# Altium PCB VM53_BASE_BOARD.PcbDoc (part 2 of 2)
Units mil, origin at the board's own origin, x right, y up, seen from the top; angles counter-clockwise.
Board outline 6151.77 x 3750.19 mil, 4 copper layers (Top Layer, Internal Plane 1, Internal Plane 2, Bottom Layer), stack 30.635 mil thick; 190 components, 126 nets, 711 pads, 402 vias.
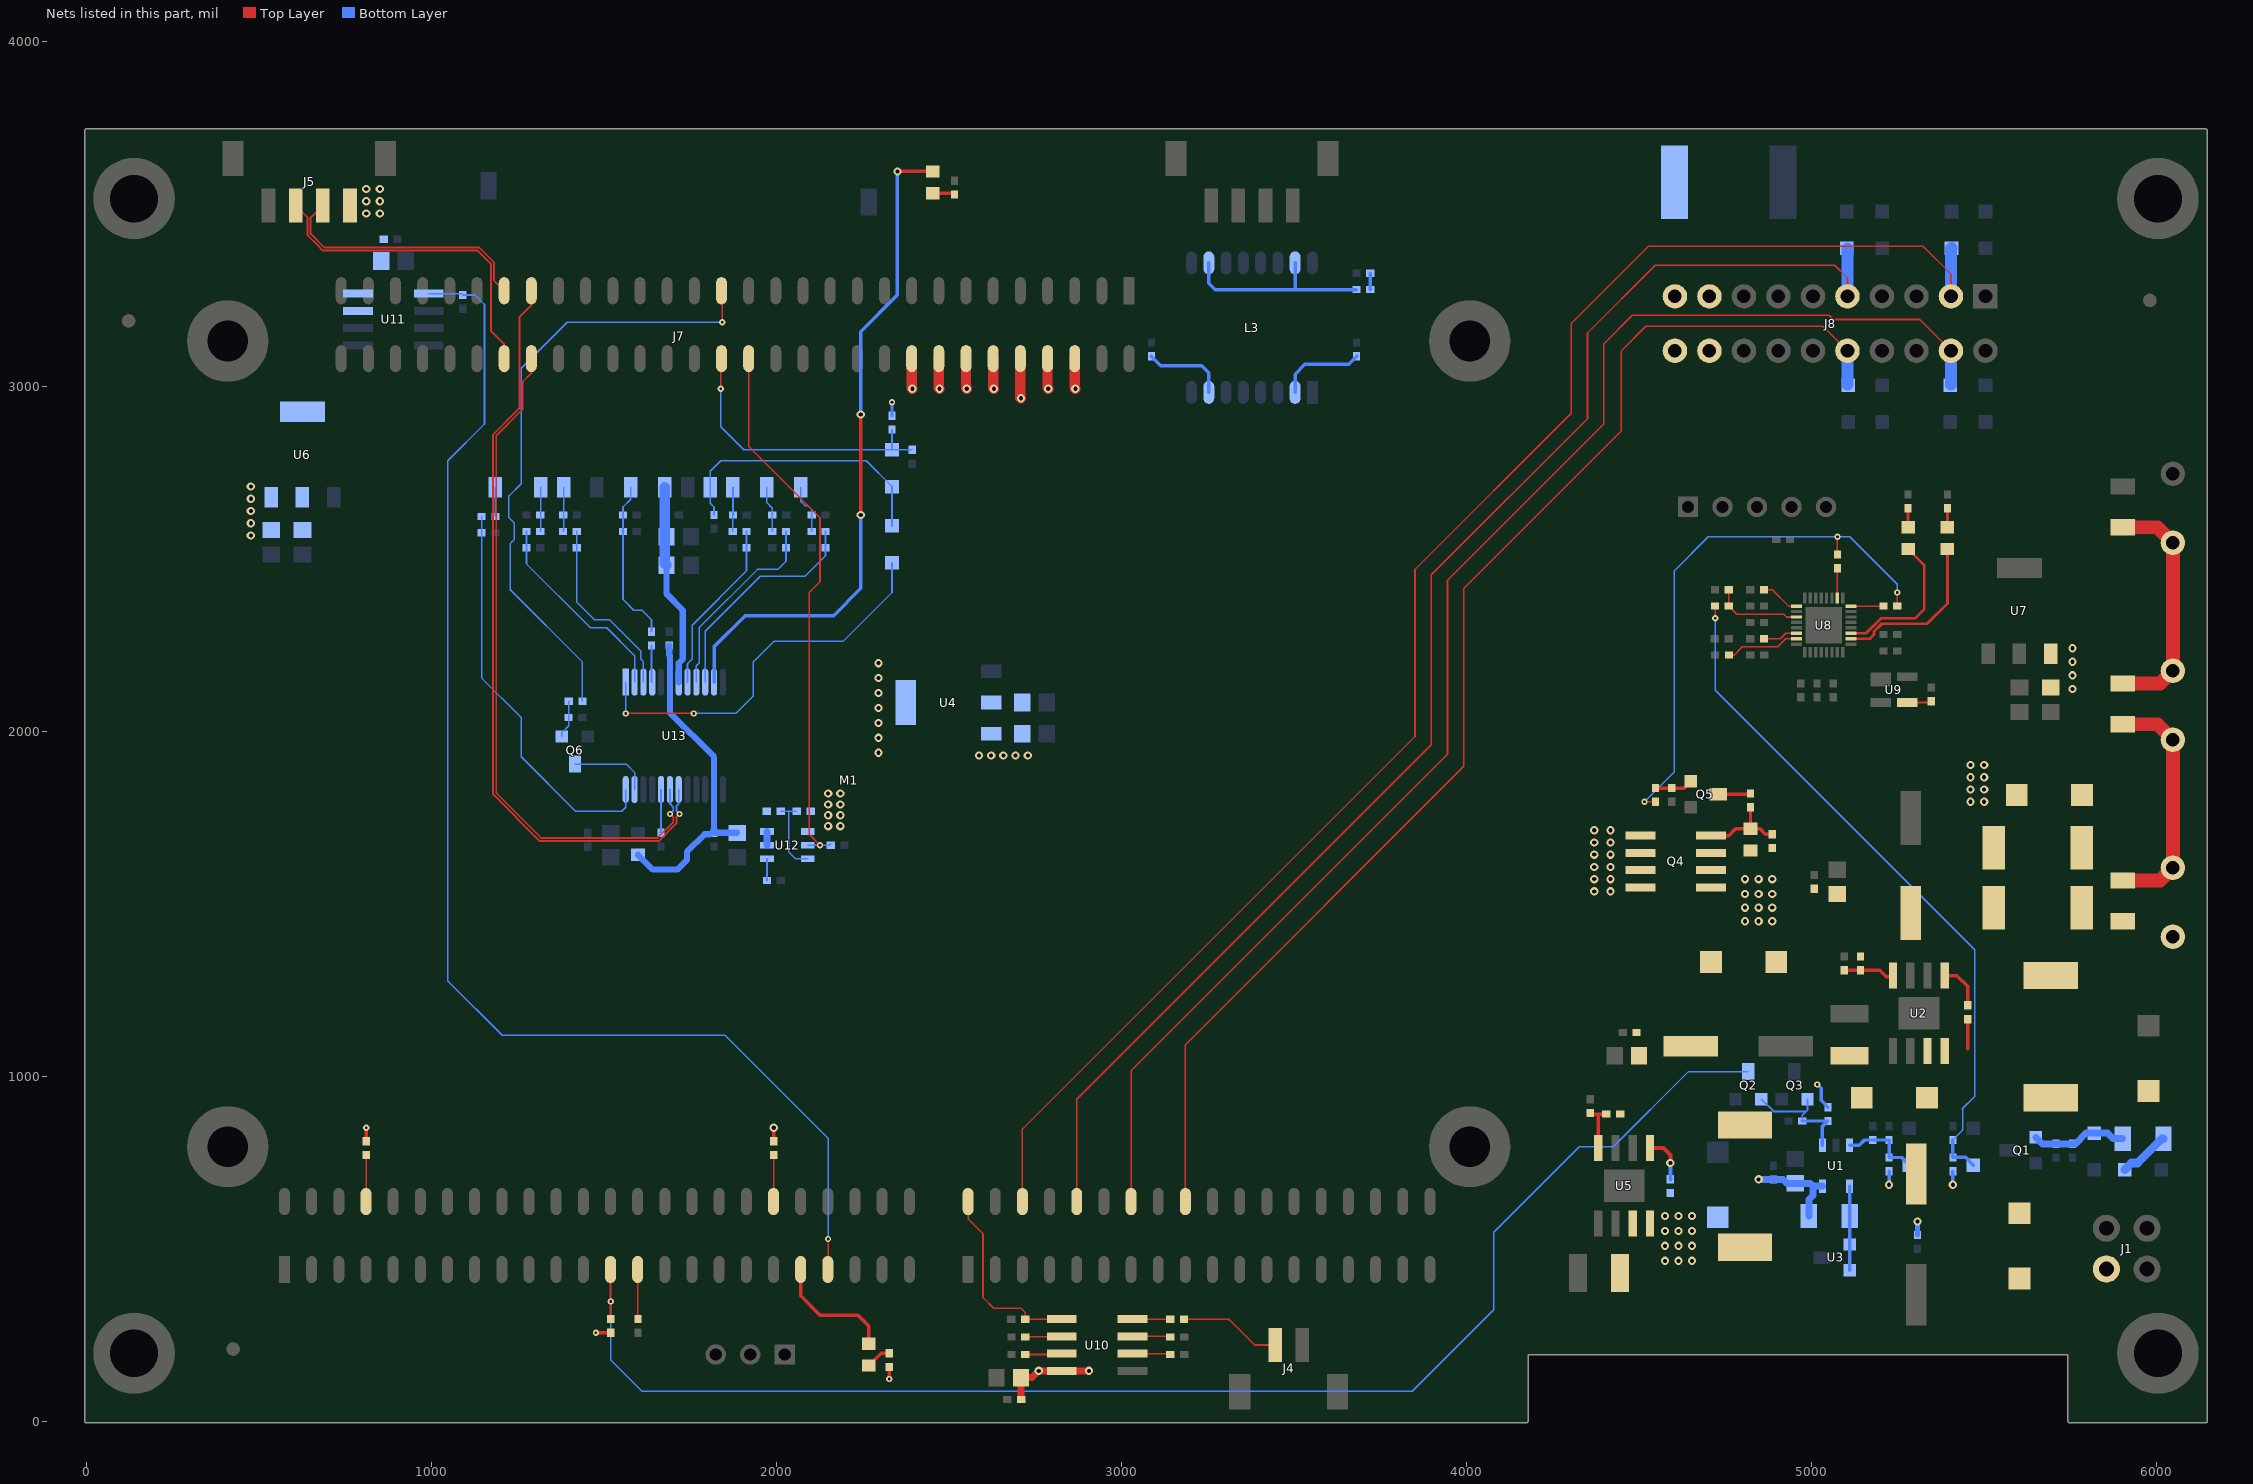
[diagram p4: the nets of this part, all layers, seen from the top]

## Via types
v1: diameter 24, hole 12, Top Layer to Bottom Layer, tented both sides, 264 vias
v2: diameter 18, hole 8, Top Layer to Bottom Layer, tented both sides, 138 vias

## Nets (pads, with @x,y where several pads share a name; then routed paths per layer and width w, separated by ;. In a path a pad name is that pad's centre, name@x,y a point inside that pad or via, vN(x,y) a via of type N, cw(c..) or ccw(c..) an arc to the next point about the centre after c; other vN are vias at no path point) (continued)
MCU-RTS: R37.1 U8.25 | length 114.1
  Top Layer w4.7: R37.1@4862.2,2409.45 4885.83,2409.45 4933.07,2362.2 U8.25@4956.69,2362.2
MCU-RXD: R38.1 U8.30 | length 101
  Top Layer w4.7: R38.1@4862.2,2267.72 4909.45,2267.72 4925.2,2283.46 U8.30@4956.69,2283.46
MCU-TXD: R39.1 U8.31 | length 216
  Top Layer w4.7: R39.1@4760.28,2220.47 4775.59,2220.47 4799.21,2244.09 4901.57,2244.09 4925.2,2267.72 U8.31@4956.69,2267.72
NetC5_2: C5.2 D3.1 R7.2 R8.2 U1.3 | length 239.5
  Bottom Layer w10: U1.3@5110.24,799.21 5137.8,799.21 5153.35,814.77 C5.2@5177.17,814.77 R8.2@5224.41,814.77 R7.2@5224.41,763.97 5261.62,763.97 D3.1@5283.46,742.13
NetC6_1: C6.1 D4.2 Q1.2 R2.1 R6.1 | length 279.3
  Bottom Layer w20: Q1.2@5649.61,822.83 5668.85,803.59 R6.1@5708.66,803.59 C6.1@5755.91,803.59 5764.22,803.59 5795.28,834.65 D4.2@5818.9,834.65 5858.27,834.65 5874.02,818.9 R2.1@5901.57,818.9
NetC7_1: C7.1 D7.2 L1.1 U2.8 | length 86.2
  Top Layer w10: 5452.76,1078.74 C7.1@5452.76,1164.91
NetC7_2: C7.2 U2.1 | length 134.9
  Top Layer w10: U2.1@5385.83,1291.34 5421.26,1291.34 5452.76,1259.84 C7.2@5452.76,1204.91
NetC9_1: C9.1 D6.1 R13.2 R14.2 R15.1
NetC9_2: C9.2 C13.1 R15.2 R16.1 | length 696.1
  Top Layer w40: R15.2@5901.57,1566.93 6010.24,1566.93 C9.2@6047.24,1603.94 C13.1@6047.24,1974.8 6002.36,2019.68 R16.1@5901.57,2019.68
NetC13_2: C13.2 C14.1 R16.2 R17.1 | length 696.1
  Top Layer w40: R16.2@5901.57,2137.8 6010.24,2137.8 C13.2@6047.24,2174.8 C14.1@6047.24,2545.67 6002.36,2590.55 R17.1@5901.57,2590.55
NetC17_1: C17.1 D9.2 L2.1 U5.8
  other v1: 4574.8,464.57 4614.17,464.57 4653.54,464.57 4574.8,507.87 4614.17,507.87 4653.54,507.87 4574.8,551.18 4614.17,551.18 4653.54,551.18 4574.8,594.49 4614.17,594.49 4653.54,594.49
NetC17_2: C17.2 U5.1 | length 137.9
  Top Layer w12: U5.1@4531.5,791.34 4570.87,791.34 4590.55,771.65 v1(4590.55,748.03)
  Bottom Layer w12: C17.2@4590.55,700.98 v1(4590.55,748.03)
NetC19_1: C19.1 Q4.4 R20.1 R21.2 | length 254.4
  Top Layer w10: Q4.4@4708.66,1697.05 4760.04,1697.05 4779.53,1716.54 C19.1@4822.83,1716.54 ; R21.2@4822.83,1779.34 C19.1@4822.83,1716.54 ; R20.1@4885.83,1701.23 4865.7,1701.23 4850.39,1716.54 C19.1@4822.83,1716.54
NetC29_1: C29.1 U9.3 | length 71.1
  Top Layer w4.7: U9.3@5276.79,2082.61 5342.89,2082.61 C29.1@5346.46,2086.17
NetC34_1: C34.1 L3.7 | length 242.8
  Bottom Layer w10: C34.1@3086.61,3086.17 3113.73,3059.06 3232.28,3059.06 3252.95,3038.39 L3.7@3252.95,2981.69
NetC35_1: C35.1 L3.2 | length 252.3
  Bottom Layer w10: L3.2@3502.95,2981.69 3502.95,3034.45 3531.5,3062.99 3657.92,3062.99 C35.1@3681.1,3086.17
NetC36_2: C36.2 R46.2 U12.6 | length 228.2
  Bottom Layer w4.7: C36.2@2012,1767.72 2035.43,1767.72 ; R46.2@2058.87,1767.72 2035.43,1767.72 ; U12.6@2090.55,1629.92 2055.12,1629.92 2035.43,1649.61 2035.43,1767.72
NetC52_1: C52.1 R66.1 | length 47.2
  Bottom Layer w10: R66.1@3720.91,3279.53 C52.1@3720.91,3326.77
NetD1_1: D1.1 J1.1
NetD2_2: D2.2 R2.2 | length 149.7
  Bottom Layer w25: D2.2@5907.48,728.35 5927.17,748.03 5944.88,748.03 6015.75,818.9 R2.2@6019.69,818.9
NetD5_2: D5.2 U2.7
NetD10_1: D10.1 R24.1 R25.1 R26.1 | length 2004.5
  Top Layer w4.7: R25.1@4719.84,2362.2 4720.47,2361.57 v2(4720.47,2326.77)
  Bottom Layer w4.7: v2(4720.47,2326.77) 4720.47,2118.11 5472.44,1366.14 5472.44,941.05 5437.01,905.61 5437.61,905.01 5437.61,842.68 R26.1@5409.45,814.52
  Bottom Layer w10: R26.1@5409.45,814.52 R24.1@5409.45,764.22 5446.41,764.22 D10.1@5468.5,742.13
NetD11_1: D11.1 R34.2 | length 54.9
  Top Layer w8: D11.1@5393.7,2590.55 R34.2@5393.7,2645.48
NetD12_1: D12.1 R35.2 | length 54.9
  Top Layer w8: D12.1@5279.53,2590.55 R35.2@5279.53,2645.48
NetD13_1: D13.1 R42.2 | length 73.8
  Top Layer w10: D13.1@2267.72,161.42 2303.34,197.04 R42.2@2326.77,197.04
NetD13_2: D13.2 M1.B39 | length 361.5
  Top Layer w10: M1.B39@2070,439.45 2070,363.07 2125.98,307.09 2236.22,307.09 2267.72,275.59 D13.2@2267.72,224.41
NetD14_1: D14.1 U13.11 | length 1952.7
  Top Layer w10: v1(2244.09,2625.98) v1(2244.09,2917.32) ; v1(2350.39,3622.05) D14.1@2452.76,3622.05
  Bottom Layer w10: U13.11@1818.9,2141.73 1818.9,2244.09 1909.45,2334.65 2165.35,2334.65 2244.09,2413.39 v1(2244.09,2625.98) ; v1(2244.09,2917.32) 2244.09,3157.48 2350.39,3263.78 v1(2350.39,3622.05)
NetD14_2: D14.2 R51.2 | length 64.7
  Top Layer w10: D14.2@2452.76,3559.06 2511.62,3559.06 R51.2@2515.75,3554.93
NetD15_1: D15.1 U13.1 | length 1151.6
  Top Layer w4.7: v2(1562.99,2051.18) v2(1759.84,2051.18)
  Bottom Layer w4.7: v2(1562.99,2051.18) U13.1@1562.99,2141.73 ; v2(1759.84,2051.18) 1881.89,2051.18 1933.07,2102.36 1933.07,2200.79 1992.13,2259.84 2192.91,2259.84 2334.65,2401.57 D15.1@2334.65,2488.19
NetF1_2: F1.2 J8.17 J8.18 J8.19 J8.20
NetJ4_1: J4.1 R43.2 | length 294.6
  Top Layer w4.7: R43.2@3181.29,295.28 3311.02,295.28 3322.83,283.46 3385.83,220.47 J4.1@3444.88,220.47
NetJ7_11: J7.11 R58.2 | length 84.7
  Bottom Layer w4.7: J7.11@1185.04,2706.69 1185.04,2622.24 R58.2@1185.23,2622.05
NetL3_10: L3.10 L3.15 R66.2 | length 572.1
  Bottom Layer w10: L3.10@3252.95,3356.89 3252.95,3298.23 3271.65,3279.53 3503.94,3279.53 ; L3.15@3502.95,3356.89 3502.95,3280.51 3503.94,3279.53 ; R66.2@3680.91,3279.53 3503.94,3279.53
NetM1_B8: M1.B8 R67.1 | length 135.3
  Top Layer w4.7: M1.B8@810.16,636.3 811.02,637.17 R67.1@811.02,771.21
NetM1_B27: M1.B27 R41.1 | length 144.1
  Top Layer w4.7: M1.B27@1597.56,439.45 1597.56,296.58 R41.1@1598.43,295.72
NetM1_B38: M1.B38 R68.1 | length 135.3
  Top Layer w4.7: M1.B38@1991.26,636.3 1992.13,637.16 R68.1@1992.13,771.21
NetQ2_2: Q2.2 Q3.2 R5.2 R11.1 U1.1 | length 366
  Bottom Layer w5: Q2.2@4854.33,933.07 4889.76,897.64 4984.25,897.64 ; R11.1@4972.88,870.08 4972.88,886.27 4984.25,897.64 ; Q3.2@4988.19,933.07 4988.19,901.57 4984.25,897.64
  Bottom Layer w10: R11.1@4972.44,870.08 R11.1@4972.88,870.08 4973.07,869.89 R5.2@5047.24,869.89 5031.5,854.14 U1.1@5031.5,799.21
NetQ5_1: Q5.1 R21.1 | length 94.5
  Top Layer w10: Q5.1@4729.61,1816.33 4819.83,1816.33 R21.1@4822.83,1819.34
NetQ5_2: Q5.2 R22.2 R23.2 | length 110.4
  Top Layer w10: R22.2@4547.24,1834.83 R23.2@4594.49,1834.83 4630.11,1834.83 Q5.2@4649.61,1854.33
NetQ6_2: Q6.2 R60.2 R61.1 | length 110.4
  Bottom Layer w4.7: Q6.2@1377.95,1984.25 1377.95,1996.06 1397.45,2015.56 R60.2@1397.45,2086.61
NetR9_1: R9.1 R10.1 U2.4 | length 150.9
  Top Layer w10: R9.1@5094.49,1306.65 R10.1@5141.73,1306.65 5197.29,1306.65 5216.54,1287.4 5231.89,1287.4 U2.4@5235.83,1291.34
NetR12_2: R12.2 U1.4 U3.1 U3.2 | length 244.3
  Bottom Layer w10: U3.2@5110.24,436.81 U1.4@5110.24,681.1
NetR18_1: R18.1 R19.1 U5.4 | length 146.8
  Top Layer w10: R18.1@4358.27,893.26 4361.76,889.76 4381.89,889.76 ; U5.4@4381.5,791.34 4381.5,889.37 4381.89,889.76 ; R19.1@4405.07,889.76 4381.89,889.76
NetR30_1: R30.1 U8.16 | length 94
  Top Layer w4.7: U8.16@5114.17,2362.2 R30.1@5208.22,2362.2
NetR32_1: R32.1 U8.18 | length 86.2
  Top Layer w4.7: U8.18@5074.8,2385.83 R32.1@5074.8,2472
NetR43_1: R43.1 U10.8 | length 109.9
  Top Layer w4.7: U10.8@3031.5,295.47 3141.09,295.47 R43.1@3141.29,295.28
NetR47_2: R47.2 U12.1 | length 63.1
  Bottom Layer w4.7: R47.2@1972.25,1566.93 1972.44,1567.12 U12.1@1972.44,1629.92
NetR54_2: R54.2 U13.4 | length 106.9
  Bottom Layer w4.7: R54.2@1637.8,2247.84 1637.8,2143.7 U13.4@1639.76,2141.73
NetR55_1: R55.1 U13.20 | length 127.2
  Bottom Layer w4.7: R55.1@1661.42,1705.17 1665.35,1709.1 U13.20@1665.35,1830.71
NetR62_1: R62.1 U10.2 | length 106.4
  Top Layer w4.7: R62.1@2720.91,244.09 2825.39,244.09 U10.2@2826.77,245.47
NetR63_2: R63.2 U10.7 | length 110.6
  Top Layer w4.7: U10.7@3031.5,245.47 3140.17,245.47 R63.2@3141.54,244.09
NetR64_1: R64.1 U10.3 | length 106.9
  Top Layer w4.7: R64.1@2720.91,192.91 2824.21,192.91 U10.3@2826.77,195.47
NetR65_2: R65.2 U10.6 | length 111.1
  Top Layer w4.7: U10.6@3031.5,195.47 3138.98,195.47 R65.2@3141.54,192.91
P3V3: C15.1 C30.1 C31.1 R4.1 R42.1 R46.1 R49.1 R67.2 R68.2 U4.2 U4.4 U10.4 U12.4 | length 464
  Top Layer w10: R67.2@811.02,811.21 v2(811.02,850.39) ; v2(1476.38,255.91) 1476.57,255.72 R4.1@1519.68,255.72 ; R68.2@1992.13,811.21 v1(1992.13,850.39) ; v2(2326.77,122.05) R42.1@2326.77,157.04
  Top Layer w20: C30.1@2709.1,62.99 2709.1,125.54 C31.1@2708.66,125.98 2740.16,125.98 v1(2759.84,145.67) 2760.04,145.47 U10.4@2826.77,145.47 2905.31,145.47 v1(2905.51,145.67)
  Bottom Layer w10: R49.1@2334.65,2913.83 v2(2334.65,2952.76)
  other v1: 2149.61,1724.41 2185.04,1724.41 2149.61,1755.91 2185.04,1755.91 2149.61,1787.4 2185.04,1787.4 2149.61,1818.9 2185.04,1818.9 2295.28,1937.01 2295.28,1980.32 2295.28,2023.62 2295.28,2066.93 2295.28,2110.24 2295.28,2153.54 2295.28,2196.85
P5V0: C20.1 U6.2 U6.4 U11.7
P7V65: C10.2 C11.1 C12.2 L1.2 R10.2 R13.1 R14.1
P8V65: C24.2 C25.1 C26.2 D8.1 L2.2 R19.2
PBKP: C1.1 C2.2 C19.2 C23.1 D6.2 D8.2 Q4.1 Q4.2 Q4.3 R5.1 R12.1 R20.2 U1.5 U7.3 | length 363.6
  Bottom Layer w10: v2(5016.19,975.94) 5027.56,964.57 5027.56,929.57 R5.1@5047.24,909.89
  Bottom Layer w20: v1(4846.46,700.79) 4846.9,700.35 C1.1@4889.76,700.35 4917.76,700.35 4929.13,688.98 C2.2@4952.76,688.98 4996.06,688.98 5003.94,681.1 ; R12.1@4992.13,594.49 4992.13,641.73 5003.94,653.54 5003.94,681.1 ; U1.5@5031.5,681.1 5003.94,681.1
  other v1: 4807.09,1448.82 4846.46,1448.82 4885.83,1448.82 4807.09,1488.19 4846.46,1488.19 4885.83,1488.19 4807.09,1527.56 4846.46,1527.56 4885.83,1527.56 4807.09,1570.87 4846.46,1570.87 4885.83,1570.87 5460.63,1795.28 5500,1795.28 5460.63,1830.71 5500,1830.71 5460.63,1866.14 5500,1866.14 5460.63,1901.57 5500,1901.57 5755.91,2122.05 5755.91,2161.42 5755.91,2200.79 5755.91,2240.16
PWR-DET: M1.B25 Q2.1 R4.2 | length 4162.7
  Top Layer w4.7: M1.B25@1518.82,439.45 1518.82,296.58 R4.2@1519.68,295.72
  Bottom Layer w4.7: v2(1519.68,346.46) 1519.68,177.17 1610.24,86.61 3842.52,86.61 4078.74,322.83 4078.74,547.24 4326.77,795.28 4425.2,795.28 4642.99,1013.07 Q2.1@4816.33,1013.07
PWR-EN: R22.1 R30.2 R32.2 | length 1594.4
  Top Layer w4.7: v2(4515.75,1795.28) 4516.19,1794.83 R22.1@4547.24,1794.83 ; R32.2@5074.8,2512 v2(5074.8,2562.99) ; v2(5248.03,2401.57) 5248.03,2362.39 R30.2@5248.22,2362.2
  Bottom Layer w4.7: v2(4515.75,1795.28) 4602.36,1881.89 4602.36,2464.57 4700.79,2562.99 v2(5074.8,2562.99) 5110.24,2562.99 5248.03,2425.2 v2(5248.03,2401.57)
PWR-LED: D12.2 U8.11 | length 434.8
  Top Layer w8: U8.11@5114.17,2283.46 5157.48,2283.46 5200.79,2326.77 5299.21,2326.77 5326.77,2354.33 5326.77,2480.32 D12.2@5279.53,2527.56
PWR-VOL: C27.1 R25.2 U8.27 | length 257.2
  Top Layer w4.7: C27.1@4760.09,2409.45 4760.09,2362.46 R25.2@4759.84,2362.2 4783.46,2338.58 4919.29,2338.58 4927.17,2330.71 U8.27@4956.69,2330.71
RSTZ: Q6.1 U13.23 | length 231.9
  Bottom Layer w4.7: Q6.1@1415.95,1904.25 1564.25,1904.25 1588.58,1879.92 U13.23@1588.58,1830.71
RUN-LED: D11.2 U8.10 | length 484.8
  Top Layer w8: U8.10@5114.17,2267.72 5169.29,2267.72 5181.1,2279.53 5181.1,2288.7 5203.42,2311.02 5334.65,2311.02 5393.7,2370.08 D11.2@5393.7,2527.56
SD-CARDIN: C45.2 D31.1 M1.A32 R49.2 | length 839.8
  Top Layer w4.7: v2(1838.58,2992.13) 1838.58,3077.32 M1.A32@1840.55,3079.29
  Bottom Layer w4.7: v2(1838.58,2992.13) 1838.58,2881.89 1905.32,2815.15 D31.1@2334.65,2815.15 ; D31.1@2334.65,2814.96 D31.1@2334.65,2815.15 ; R49.2@2334.65,2873.83 D31.1@2334.65,2815.15 ; C45.2@2393.7,2815.15 D31.1@2334.65,2815.15
SD-CD: D15.2 D16.2 D31.2 J7.10 | length 815.5
  Bottom Layer w4.7: D16.2@1818.9,2626.17 1818.9,2649.61 1808.27,2660.24 J7.10@1808.27,2706.69 1808.27,2753.15 1838.58,2783.46 2259.84,2783.46 D31.2@2334.65,2708.66 D15.2@2334.65,2594.49
SD-CLK: C46.2 D19.2 J7.5 R54.1 | length 476.2
  Bottom Layer w4.7: J7.5@1577.56,2706.69 1577.56,2672.05 1555.12,2649.61 D19.2@1555.12,2625.98 C46.2@1555.12,2578.74 1555.12,2381.89 1586.61,2350.39 1610.24,2350.39 1637.8,2322.83 R54.1@1637.8,2287.84
SD-CMD: C48.2 R52.2 U13.8 | length 507.8
  Bottom Layer w4.7: U13.8@1742.13,2141.73 1742.13,2194.88 1755.91,2208.66 1755.91,2307.09 1913.13,2464.31 C48.2@1913.13,2531.5 R52.2@1913.13,2578.74
SD-CMD-P: D18.2 J7.2 R52.1 | length 128.5
  Bottom Layer w4.7: R52.1@1873.13,2578.74 1873.13,2625.29 D18.2@1873.83,2625.98 1873.83,2706.09 J7.2@1873.23,2706.69
SD-DAT0: C49.2 R53.2 U13.3 | length 542.3
  Bottom Layer w4.7: R53.2@1421.26,2578.74 C49.2@1421.26,2531.5 1421.26,2374.02 1472.44,2322.83 1515.75,2322.83 1606.3,2232.28 1606.3,2208.66 1614.17,2200.79 U13.3@1614.17,2141.73
SD-DAT0-P: D20.2 J7.7 R53.1 | length 129
  Bottom Layer w4.7: R53.1@1381.26,2578.74 1383.86,2581.34 J7.7@1383.86,2706.69
SD-DAT1: C50.2 R56.2 U13.2 | length 594.4
  Bottom Layer w4.7: R56.2@1275.4,2578.74 C50.2@1275.4,2531.5 1275.4,2484.44 1460.63,2299.21 1507.87,2299.21 1588.58,2218.5 U13.2@1588.58,2141.73
SD-DAT1-P: D21.2 J7.8 R56.1 | length 128.6
  Bottom Layer w4.7: R56.1@1315.4,2578.74 1316.93,2580.27 J7.8@1316.93,2706.69
SD-DAT2: C51.2 R57.2 U13.10 | length 657.5
  Bottom Layer w4.7: U13.10@1793.31,2141.73 1793.31,2289.37 1952.76,2448.82 2082.68,2448.82 2141.92,2508.06 C51.2@2141.92,2531.5 R57.2@2141.92,2578.74
SD-DAT2-P: D22.2 J7.9 R57.1 | length 145.8
  Bottom Layer w4.7: J7.9@2070.08,2706.69 2070.08,2666.14 2082.68,2653.54 2090.55,2653.54 2101.92,2642.17 R57.1@2101.92,2578.74
SD-DAT3: C47.2 R50.2 U13.9 | length 579.2
  Bottom Layer w4.7: U13.9@1767.72,2141.73 1767.72,2188.98 1775.59,2196.85 1775.59,2299.21 1944.88,2468.5 2003.94,2468.5 2027.56,2492.13 C47.2@2027.56,2531.5 R50.2@2027.56,2578.74
SD-DAT3-P: D17.2 J7.1 R50.1 | length 134.9
  Bottom Layer w4.7: J7.1@1971.65,2706.69 1971.65,2662.2 1988,2645.86 D17.2@1988,2625.98 1987.56,2625.54 R50.1@1987.56,2578.74
SD-PWR-EN: M1.A30 R48.2 U12.5 | length 1590.3
  Top Layer w4.7: M1.A30@1919.29,3079.29 1919.29,2824.8 2125.98,2618.11 2125.98,2433.07 2094.49,2401.57 2094.49,1700.79 v2(2125.98,1669.29)
  Bottom Layer w4.7: U12.5@2090.55,1669.29 v2(2125.98,1669.29) 2153.54,1669.29 R48.2@2157.48,1673.23
SD-RST: M1.A31 R60.1 | length 1807.8
  Top Layer w4.7: M1.A31@1840.55,3276.14 1842.52,3274.17 v2(1842.52,3185.04)
  Bottom Layer w4.7: R60.1@1437.45,2086.61 1437.45,2200.35 1228.35,2409.45 1228.35,2543.31 1240.16,2555.12 1240.16,2602.86 1223.81,2619.21 1223.81,2633.36 1224.41,2633.96 1224.41,2681.1 1259.84,2716.54 1259.84,3051.18 1393.7,3185.04 v2(1842.52,3185.04)
SD-V33: C42.2 C43.2 C44.2 J7.4 U13.7 | length 591.5
  Bottom Layer w18: C44.2@1681.1,2480.31 1681.1,2397.64 1728.35,2350.39 1728.35,2208.66 1716.54,2196.85 U13.7@1716.54,2141.73
  Bottom Layer w30: J7.4@1675.98,2706.69 1675.98,2485.43 C44.2@1681.1,2480.31
SD-WP: R58.1 R59.1 U13.24 | length 1168.8
  Bottom Layer w4.7: R58.1@1145.23,2622.05 R59.1@1145.23,2574.8 1145.23,2153.98 1259.84,2039.37 1259.84,1925.2 1417.32,1767.72 1551.18,1767.72 1562.99,1779.53 U13.24@1562.99,1830.71
SDVDD: C36.1 C37.1 C38.2 C39.1 L4.1 U12.2 U12.3 U13.6 U13.14 | length 986.1
  Bottom Layer w18: L4.1@1598.43,1641.73 1641.73,1598.43 1712.6,1598.43 1740.16,1625.98 1740.16,1649.61 1791.34,1700.79 1807.09,1700.79 ; C38.2@1688.98,2247.84 1688.98,2220.47 1691.35,2218.09 1691.35,2142.14 U13.6@1690.95,2141.73 1690.95,2053.15 1818.9,1925.2 U13.14@1818.9,1830.71 C37.1@1818.9,1705.17 1885.39,1705.17 C39.1@1885.83,1704.72
  Bottom Layer w20: U12.2@1972.44,1669.29 U12.3@1972.44,1708.66
USB0_N: M1.A45 U13.18 | length 2223.8
  Top Layer w5.3: M1.A45@1289.37,3276.14 1289.37,3234.12 1254.78,3199.53 1254.78,2935.88 1178.47,2859.57 1178.47,1816.68 1314.04,1681.1 1658.4,1681.1 1709.79,1732.49 1709.79,1751.97 1717.66,1759.84 v2(1719.14,1759.84)
  Bottom Layer w5.3: U13.18@1716.54,1830.71 1716.54,1788.69 1709.79,1781.94 1709.79,1769.19 v2(1719.14,1759.84)
USB0_P: M1.A46 U13.19 | length 1995.1
  Top Layer w5.3: M1.A46@1289.37,3079.29 1289.37,3037.27 1263.78,3011.68 1263.78,2932.15 1187.47,2855.84 1187.47,1820.41 1317.77,1690.1 1654.67,1690.1 1700.79,1736.22 1700.79,1751.97 1692.91,1759.84 v2(1691.44,1759.84)
  Bottom Layer w5.3: U13.19@1690.95,1830.71 1690.95,1788.69 1691.63,1788.69 1700.79,1779.53 1700.79,1769.19 v2(1691.44,1759.84)
USB1_N: J5.2 M1.A47 | length 757.5
  Top Layer w5.3: J5.2@685.04,3523.62 649.61,3488.19 649.61,3440.94 688.98,3401.57 1137.8,3401.57 1181.1,3358.27 1181.1,3305.67 M1.A47@1210.63,3276.14
USB1_P: J5.3 M1.A48 | length 957.6
  Top Layer w5.3: J5.3@606.3,3523.62 640.61,3489.31 640.61,3437.22 668.37,3409.45 685.25,3392.57 1134.07,3392.57 1172.1,3354.54 1172.1,3159.84 1210.63,3121.31 M1.A48@1210.63,3079.29
VBUS: C32.1 C33.1 J5.1 U11.8
  other v1: 811.02,3500 850.39,3500 811.02,3535.43 850.39,3535.43 811.02,3570.87 850.39,3570.87
VBUS-EN: M1.B41 R45.2 U11.1 | length 3850.5
  Top Layer w4.7: M1.B41@2148.74,439.45 2149.61,440.31 v2(2149.61,527.56)
  Bottom Layer w4.7: U11.1@992.13,3267.91 1086.61,3267.91 R45.2@1090.55,3263.97 1125.8,3263.97 1153.54,3236.22 1153.54,2889.76 1047.24,2783.46 1047.24,1275.59 1204.72,1118.11 1850.39,1118.11 2149.61,818.9 v2(2149.61,527.56)
VCORE: C16.1 C22.1 M1.A6 M1.A8 M1.A10 M1.A12 M1.A14 M1.A16 M1.A18 Q4.5 Q4.6 Q4.7 Q4.8 U4.3 U6.3 | length 643.4
  Top Layer w30: M1.A18@2391.73,3079.29 2391.73,2994.09 v1(2393.7,2992.13) ; M1.A16@2470.47,3079.29 2470.47,2994.09 v1(2472.44,2992.13) ; M1.A14@2549.21,3079.29 2549.21,2994.09 v1(2551.18,2992.13) ; M1.A12@2627.95,3079.29 2627.95,2994.09 v1(2629.92,2992.13) ; M1.A10@2706.69,3079.29 2706.69,2966.54 v1(2708.66,2964.57) ; M1.A8@2785.43,3079.29 2785.43,2994.09 v1(2787.4,2992.13) ; M1.A6@2864.17,3079.29 2864.17,2994.09 v1(2866.14,2992.13)
  other v1: 4370.08,1535.43 4417.32,1535.43 4370.08,1570.87 4417.32,1570.87 4370.08,1606.3 4417.32,1606.3 4370.08,1641.73 4417.32,1641.73 4370.08,1677.17 4417.32,1677.17 4370.08,1712.6 4417.32,1712.6 2586.61,1929.13 2622.05,1929.13 2657.48,1929.13 2692.91,1929.13 2728.35,1929.13 476.38,2566.93 476.38,2602.36 476.38,2637.8 476.38,2673.23 476.38,2708.66
VIDEO-IN1: D24.1 J8.3 M1.C6 | length 4635.9
  Top Layer w4.7: M1.C6@2712.64,636.3 2712.64,846.5 3850.39,1984.25 3850.39,2468.5 4303.15,2921.26 4303.15,3181.1 4527.56,3405.51 5322.83,3405.51 5403.94,3324.41 J8.3@5403.94,3259.84
  Bottom Layer w35: J8.3@5403.94,3259.84 5403.94,3398.03 D24.1@5405.51,3399.61
VIDEO-IN2: D27.2 J8.9 M1.C10 | length 4172.5
  Top Layer w4.7: M1.C10@2870.12,636.3 2870.12,933.11 3897.64,1960.63 3897.64,2452.76 4350.39,2905.51 4350.39,3153.54 4547.24,3350.39 5066.93,3350.39 5103.94,3313.39 J8.9@5103.94,3259.84
  Bottom Layer w35: J8.9@5103.94,3259.84 D27.2@5103.94,3398.03
VIDEO-IN3: D26.1 J8.4 M1.C14 | length 4234.2
  Top Layer w4.7: M1.C14@3027.6,636.3 3027.6,1015.79 3944.88,1933.07 3944.88,2437.01 4397.64,2889.76 4397.64,3122.05 4480.32,3204.72 5051.18,3204.72 5062.99,3192.91 5313.39,3192.91 J8.4@5403.94,3102.36
  Bottom Layer w35: D26.1@5403.94,3004.33 J8.4@5403.94,3102.36
VIDEO-IN4: D29.2 J8.10 M1.C18 | length 3801.4
  Top Layer w4.7: M1.C18@3185.08,636.3 3185.08,1090.59 3992.13,1897.64 3992.13,2413.39 4448.82,2870.08 4448.82,3102.36 4519.69,3173.23 5033.07,3173.23 J8.10@5103.94,3102.36
  Bottom Layer w35: D29.2@5103.94,3004.33 J8.10@5103.94,3102.36
VIDEO-OUT: M1.C2 R44.2 U10.1 | length 561.9
  Top Layer w4.7: M1.C2@2555.16,636.3 2555.16,586.57 2598.43,543.31 2598.43,358.27 2629.92,326.77 2708.66,326.77 2720.66,314.77 R44.2@2720.66,295.28 2720.86,295.47 U10.1@2826.77,295.47
VIN: C3.1 C4.2 C8.1 C18.1 D1.2 D5.1 R7.1 R24.2 U5.7 | length 117.3
  Bottom Layer w10: v1(5224.41,685.04) R7.1@5224.41,723.97 ; v1(5409.45,685.04) R24.2@5409.45,724.22
  Bottom Layer w15: C4.2@5307.09,539.56 v1(5307.09,578.74)
pads on no net: Designator1. Designator2. Designator3. Designator4. Designator5. Designator6. J1.3 J8.13 J8.14 J8.15 J8.16 L3.4 L3.5 L3.12 L3.13 M1.A20 M1.A22 M1.A23 M1.A24 M1.A25 M1.A26 M1.A27 M1.A28 M1.A33 M1.A34 M1.A35 M1.A36 M1.A37 M1.A38 M1.A39 M1.A40 M1.A41 M1.A42 M1.A50 M1.A51 M1.A52 M1.A53 M1.A54 M1.A55 M1.A56 M1.A57 M1.A58 M1.B1 M1.B2 M1.B3 M1.B4 M1.B5 M1.B7 M1.B9 M1.B10 M1.B13 M1.B14 M1.B15 M1.B16 M1.B19 M1.B20 M1.B21 M1.B22 M1.B28 M1.B29 M1.B30 M1.B37 M1.B40 M1.B42 M1.B43 M1.B44 M1.B46 M1.C1 M1.C21 M1.C22 M1.C25 M1.C26 M1.C29 M1.C30 M1.C33 M1.C34 U2.2 U2.3 U2.5 U5.2 U5.3 U5.5 U8.4 U8.14 U8.15 U8.17 U11.2 U11.3 U11.5 U13.12 U13.13 U13.15

## Polygon pours and split planes (outlines as drawn)
GND on Top Layer "Top Layer-No Net 1" (solid, remove dead copper, pour order 30): 4330.71,192.91 4330.71,622.05 4342.52,633.86 4515.75,633.86 4515.75,728.35 4342.52,728.35 4330.71,740.16 4330.71,834.65 4303.15,862.2 4303.15,885.83 4303.15,917.32 4318.9,933.07 4397.64,933.07 4433.07,968.5 4452.76,988.19 4452.76,996.06 4452.76,1035.43 4452.76,1082.68 4452.76,1106.3 4452.76,1232.28 4511.81,1291.34 4578.74,1291.34 4598.43,1311.03 4598.42,1444.88 4570.87,1472.44 4322.83,1472.44 4287.4,1507.87 4287.4,1736.22 4326.77,1775.59 4411.42,1775.59 4517.72,1881.89 4814.96,1881.89 4858.27,1838.58 4858.27,1783.46 4891.73,1750 4964.57,1677.17 4964.57,1610.24 4984.25,1590.55 5161.42,1590.55 5204.72,1633.86 5350.39,1633.86 5366.14,1649.61 5366.14,1740.16 5389.76,1763.78 5389.76,1925.2 5421.26,1956.69 5681.1,1956.69 5771.65,1956.69 5830.71,2015.75 5830.71,2649.61 5862.2,2681.1 6118.12,2681.1 6137.8,2700.78 6137.8,3744.09 -3.74,3744.09 -3.94,3649.61 -3.94,-3.74 4177.07,-3.84 4177.07,192.82
VBUS on Top Layer "Top Layer-No Net 1" (solid, pour order 67): 775.59,3586.61 858.27,3586.61 866.14,3586.61 874.02,3578.74 874.02,3519.68 874.02,3472.44 866.14,3464.57 744.09,3464.57 736.22,3472.44 736.22,3578.74 744.09,3586.61
MCU-3V3 on Top Layer "Top Layer-No Net 1" (solid, remove dead copper, pour order 42): 5590.55,2098.43 5629.92,2098.43 5633.86,2102.36 5633.86,2283.46 5645.67,2295.28 5653.54,2303.15 5661.42,2303.15 5771.65,2303.15 5775.59,2307.09 5787.4,2318.9 5787.4,2326.77 5787.4,2488.19 5787.4,2543.31 5771.65,2559.06 5476.38,2559.06 5460.63,2543.31 5460.63,2303.15 5480.31,2283.46 5484.25,2283.46 5559.06,2283.46 5570.87,2271.65 5570.87,2102.36 5574.8,2098.43
PBKP on Top Layer "Top Layer-No Net 1" (solid, remove dead copper, pour order 41): 5661.42,2283.46 5771.65,2283.46 5787.4,2267.72 5787.4,2118.11 5787.4,2114.17 5771.65,2098.43 5661.42,2098.43 5649.61,2110.24 5649.61,2114.17 5649.61,2271.65
PBKP on Top Layer "Top Layer-No Net 1" (solid, remove dead copper, pour order 40): 4692.91,1275.59 4716.54,1275.59 4728.35,1275.59 4748.03,1295.28 4748.03,1307.09 4748.03,1393.7 4775.59,1421.26 4779.53,1425.2 4791.34,1425.2 4897.64,1425.2 4913.39,1440.94 4913.39,1657.48 4901.57,1669.29 4649.61,1669.29 4637.8,1657.48 4637.8,1291.34 4653.54,1275.59
PBKP on Top Layer "Top Layer-No Net 1" (solid, remove dead copper, pour order 39): 5586.61,1771.65 5460.63,1771.65 5437.01,1771.65 5425.2,1783.46 5425.2,1791.34 5425.2,1909.45 5437.01,1921.26 5649.61,1921.26 5661.42,1909.45 5661.42,1783.46 5649.61,1771.65
NetC7_1 on Top Layer "Top Layer-No Net 1" (solid, pour order 38): 5381.89,1023.62 5393.7,1011.81 5405.51,1000 5417.32,988.19 5417.32,976.38 5417.32,968.5 5417.32,940.94 5437.01,921.26 5523.62,921.26 5523.62,1023.62
NetC9_1 on Top Layer "Top Layer-No Net 1" (solid, remove dead copper, pour order 37): 5767.72,1885.83 5826.77,1885.83 5838.58,1874.02 5838.58,1523.62 5850.39,1511.81 5854.33,1507.87 5862.2,1500 6110.24,1500 6122.05,1488.19 6122.05,1338.58 6106.3,1322.83 5877.95,1322.83 5862.2,1338.58 5862.2,1377.95 5834.65,1405.51 5771.65,1405.51 5740.16,1405.51 5716.54,1429.13 5716.54,1874.02 5728.35,1885.83
P7V65 on Top Layer "Top Layer-No Net 1" (solid, remove dead copper, pour order 36): 5755.91,1208.66 5610.24,1208.66 5559.06,1208.66 5507.87,1259.84 5472.44,1295.28 5472.44,1322.83 5440.94,1354.33 5433.07,1362.2 5350.39,1362.2 5181.1,1362.2 5165.35,1346.46 5153.54,1346.46 5122.05,1346.46 5122.05,1397.64 5074.8,1444.88 5059.06,1460.63 5023.62,1460.63 4968.5,1460.63 4956.69,1472.44 4956.69,1543.31 4968.5,1555.12 5177.17,1555.12 5224.41,1602.36 5377.95,1602.36 5401.57,1625.98 5401.57,1669.29 5401.57,1720.47 5429.13,1748.03 5602.36,1748.03 5629.92,1720.47 5629.92,1437.01 5657.48,1409.45 5685.04,1381.89 5818.9,1381.89 5838.58,1362.2 5838.58,1228.35 5818.9,1208.66
GND on Top Layer "Top Layer-No Net 1" (solid, remove dead copper, pour order 35): 5956.69,1090.55 6015.75,1090.55 6051.18,1090.55 6062.99,1102.36 6062.99,1248.03 6051.18,1259.84 5901.57,1259.84 5889.76,1248.03 5889.76,1102.36 5901.57,1090.55
NetC7_1 on Top Layer "Top Layer-No Net 1" (solid, remove dead copper, pour order 34): 5374.02,1118.11 5476.38,1118.11 5507.87,1086.61 5834.65,1086.61 5877.95,1043.31 5649.61,1043.31 6051.18,1043.31 6062.99,1031.5 6062.99,842.52 6051.18,830.71 5578.74,830.71 5507.87,901.57 5494.09,915.35 5476.38,933.07 5442.91,966.54 5417.32,992.13 5396.89,1008.62 5393.7,1011.81 5381.89,1023.62 5370.08,1035.43 5370.08,1047.24 5370.08,1114.17
NetD5_2 on Top Layer "Top Layer-No Net 1" (solid, remove dead copper, pour order 33): 5322.83,881.89 5385.83,881.89 5393.7,889.76 5393.7,984.25 5377.95,1000 5358.27,1019.69 5358.27,1047.24 5358.27,1106.3 5358.27,1114.17 5354.33,1118.11 5318.9,1118.11 5314.96,1114.17 5314.96,1019.68 5287.4,992.13 5279.53,984.25 5279.53,921.26 5279.53,889.76 5287.4,881.89
GND on Top Layer "Top Layer-No Net 1" (solid, remove dead copper, pour order 32): 5220.47,1232.28 5362.2,1232.28 5389.76,1232.28 5397.64,1224.41 5397.64,1137.8 5389.76,1129.92 5196.85,1129.92 5039.37,1129.92 5019.69,1110.24 5019.69,1070.87 5019.69,1011.81 5003.94,996.06 4814.96,996.06 4803.15,1007.87 4803.15,1137.8 4838.58,1173.23 4846.46,1181.1 4850.39,1185.04 4866.14,1185.04 4897.64,1185.04 4956.69,1185.04 5003.94,1232.28
P8V65 on Top Layer "Top Layer-No Net 1" (solid, remove dead copper, pour order 30): 4484.25,984.25 4484.25,933.07 4476.38,925.2 4472.44,921.26 4448.82,921.26 4440.94,913.39 4440.94,870.08 4448.82,862.2 4452.76,862.2 4622.05,862.2 4669.29,814.96 4685.04,814.96 4685.04,877.95 4685.04,984.25
P8V65 on Top Layer "Top Layer-No Net 1" (solid, remove dead copper, pour order 27): 4732.28,740.16 4803.15,740.16 4889.76,740.16 4929.13,740.16 4944.88,755.91 4944.88,952.76 4925.2,972.44 4818.9,972.44 4799.21,972.44 4775.59,996.06 4775.59,1149.61 4826.77,1200.79 4834.65,1208.66 4854.33,1208.66 4944.88,1208.66 4980.32,1244.09 4988.19,1251.97 4988.19,1303.15 4988.19,1385.83 4972.44,1401.57 4964.57,1401.57 4795.28,1401.57 4771.65,1377.95 4771.65,1287.4 4736.22,1251.97 4527.56,1251.97 4498.03,1222.44 4484.25,1208.66 4484.25,1039.37 4484.25,984.25 4507.87,960.63 4570.87,897.64 4594.49,897.64 4618.11,897.64 4657.48,858.27 4669.29,846.46 4669.29,755.91 4673.23,755.91 4688.98,740.16
NetC17_1 on Top Layer "Top Layer-No Net 1" (solid, remove dead copper, pour order 25): 4535.43,618.11 4598.43,618.11 4933.07,618.11 4944.88,606.3 4944.88,452.76 4944.88,437.01 4944.88,433.07 4933.07,421.26 4570.87,421.26 4543.31,421.26 4523.62,440.94 4515.75,448.82 4515.75,472.44 4515.75,614.17 4519.69,618.11
GND on Top Layer "Top Layer-No Net 1" (solid, remove dead copper, pour order 24): 5283.46,507.87 5259.84,484.25 5251.97,476.38 5232.28,456.69 5232.28,440.94 5232.28,326.77 5232.28,232.28 5248.03,216.54 5476.38,216.54 5492.13,232.28 5492.13,492.13 5476.38,507.87
VIN on Top Layer "Top Layer-No Net 1" (solid, remove dead copper, pour order 23): 5574.8,532.48 5619.09,532.48 5632.87,532.48 5673.23,532.48 5692.91,552.17 5692.91,677.17 5643.7,726.38 5610.24,726.38 5592.52,726.38 5574.8,744.09 5460.63,858.27 5275.59,858.27 5228.35,905.51 5208.66,925.2 5208.66,956.69 5208.66,984.25 5192.91,1000 5192.91,1027.56 5192.91,1094.49 5177.17,1110.24 5051.18,1110.24 5039.37,1098.43 5039.37,437.01 5000,397.64 4531.5,397.64 4507.87,421.26 4500,429.13 4500,433.07 4500,614.17 4496.06,618.11 4464.57,618.11 4460.63,614.17 4460.63,610.24 4460.63,523.62 4448.82,511.81 4444.88,507.87 4437.01,507.87 4413.39,507.87 4397.64,492.13 4397.64,232.28 4413.39,216.54 5188.98,216.54 5208.66,236.22 5208.66,452.76 5208.66,476.38 5264.76,532.48 5416.34,532.48
NetD1_1 on Top Layer "Top Layer-No Net 1" (solid, remove dead copper, pour order 22): 5586.61,496.06 5732.28,496.06 5889.76,496.06 5901.57,484.25 5901.57,334.65 5889.76,322.83 5527.56,322.83 5515.75,334.65 5515.75,484.25 5527.56,496.06
VCORE on Top Layer "Top Layer-No Net 1" (solid, remove dead copper, pour order 29): 4350.39,1736.22 4507.87,1736.22 4566.93,1736.22 4582.68,1720.47 4582.68,1523.62 4566.93,1507.87 4342.52,1507.87 4326.77,1523.62 4326.77,1531.5 4326.77,1720.47 4342.52,1736.22
GND on Bottom Layer "Top Layer-No Net 1" (solid, remove dead copper, pour order 32): 6145.57,-3.84 6145.57,3744 -3.84,3744 -3.84,-3.84
VBUS on Bottom Layer "Top Layer-No Net 1" (solid, pour order 65): 791.34,3251.97 846.46,3251.97 874.02,3251.97 881.89,3259.84 881.89,3401.57 874.02,3409.45 874.02,3433.07 874.02,3566.93 874.02,3578.74 866.14,3586.61 748.03,3586.61 740.16,3578.74 740.16,3259.84 748.03,3251.97
P5V0 on Bottom Layer "Top Layer-No Net 1" (solid, pour order 63): 625.98,2551.18 641.73,2551.18 653.54,2551.18 665.35,2562.99 665.35,2736.22 681.1,2751.97 755.91,2751.97 767.72,2763.78 767.72,2897.64 724.41,2940.94 700.79,2964.57 700.79,3086.61 700.79,3181.1 712.6,3192.91 716.54,3196.85 740.16,3196.85 834.65,3196.85 838.58,3200.79 838.58,3232.28 838.58,3236.22 834.65,3240.16 712.6,3240.16 614.17,3240.16 574.8,3200.79 570.87,3196.85 570.87,3102.36 570.87,3031.5 531.5,2992.13 448.82,2909.45 448.82,2791.34 448.82,2763.78 460.63,2751.97 566.93,2751.97 590.55,2728.35 590.55,2559.06 598.43,2551.18
VCORE on Bottom Layer "Top Layer-No Net 1" (solid, pour order 61): 527.56,2728.35 559.06,2728.35 570.87,2716.54 570.87,2712.6 570.87,2562.99 559.06,2551.18 460.63,2551.18 448.82,2562.99 448.82,2716.54 460.63,2728.35
SDVDD on Bottom Layer "Top Layer-No Net 1" (solid, pour order 55): 1980.31,1649.61 2003.94,1649.61 2011.81,1657.48 2011.81,1669.29 2011.81,1728.35 2000,1740.16 1988.19,1751.97 1988.19,1779.53 1988.19,1783.46 1980.31,1791.34 1937.01,1791.34 1913.39,1767.72 1846.46,1767.72 1811.02,1767.72 1799.21,1755.91 1799.21,1696.85 1807.09,1688.98 1838.58,1688.98 1854.33,1673.23 1877.95,1673.23 1917.32,1673.23 1940.94,1649.61
P3V3 on Bottom Layer "Top Layer-No Net 1" (solid, remove dead copper, pour order 51): 2744.09,2066.93 2744.09,2118.11 2736.22,2125.98 2732.28,2129.92 2669.29,2129.92 2562.99,2129.92 2555.12,2137.8 2555.12,2153.54 2555.12,2216.54 2543.31,2228.35 2267.72,2228.35 2251.97,2212.6 2251.97,1921.26 2267.72,1905.51 2535.43,1905.51 2543.31,1913.39 2543.31,2035.43 2559.06,2051.18 2586.61,2051.18 2629.92,2051.18 2736.22,2051.18 2744.09,2059.06
VCORE on Bottom Layer "Top Layer-No Net 1" (solid, pour order 49): 2578.74,2035.43 2677.17,2035.43 2736.22,2035.43 2744.09,2027.56 2744.09,1913.39 2736.22,1905.51 2574.8,1905.51 2566.93,1913.39 2566.93,2027.56 2574.8,2035.43
NetC17_1 on Bottom Layer "Top Layer-No Net 1" (solid, remove dead copper, pour order 26): 4535.43,586.61 4535.43,625.98 4535.43,657.48 4547.24,669.29 4807.09,669.29 4818.9,657.48 4818.9,437.01 4807.09,425.2 4547.24,425.2 4535.43,437.01
NetF1_2 on Bottom Layer "Top Layer-No Net 1" (solid, remove dead copper, pour order 28): 4566.93,3720.47 4688.98,3720.47 4736.22,3720.47 4748.03,3708.66 4748.03,3704.72 4748.03,3066.93 4736.22,3055.12 4539.37,3055.12 4527.56,3066.93 4527.56,3708.66 4539.37,3720.47
P3V3 on Bottom Layer "Top Layer-No Net 1" (solid, remove dead copper, pour order 31): 2094.49,1692.91 2122.05,1692.91 2133.86,1704.72 2153.54,1704.72 2196.85,1704.72 2204.72,1712.6 2204.72,1826.77 2196.85,1834.65 2098.43,1834.65 2090.55,1826.77 2090.55,1748.03 2082.68,1740.16 2078.74,1736.22 2066.93,1736.22 2062.99,1736.22 2055.12,1728.35 2055.12,1700.79 2062.99,1692.91
GND on Internal Plane 1 (split plane): 6126.65,15.08 5763.12,15.08 5763.12,191.84 5762.73,195.76 5761.59,199.53 5759.73,203 5757.23,206.05 5754.18,208.55 5750.71,210.4 5746.94,211.55 5743.02,211.93 4178.25,211.93 4174.32,211.55 4170.55,210.4 4167.08,208.55 4164.03,206.05 4161.54,203 4159.68,199.53 4158.53,195.76 4158.15,191.84 4158.15,15.08 15.08,15.08 15.08,3725.08 6126.65,3725.08
MCU-3V3 on Internal Plane 2 (split plane): 5856.06,2313.24 5511.81,2313.24 5509.2,2312.89 5506.77,2311.88 5504.68,2310.28 5503.08,2308.19 5502.07,2305.76 5501.72,2303.15 5501.72,1958.91 4577.02,1958.91 4577.02,2769.44 5856.06,2769.44
PBKP on Internal Plane 2 (split plane): 5856.06,2275.59 5856.06,1929.13 5856.06,1549.46 5374.02,1549.46 5371.41,1549.11 5368.97,1548.11 5366.88,1546.5 5162.16,1341.78 5160.56,1339.69 5159.55,1337.26 5159.2,1334.65 5159.2,1094.49 5159.2,580.95 4813.24,580.95 4813.24,1181.1 4812.89,1183.71 4811.88,1186.15 4810.28,1188.23 4808.19,1189.84 4805.76,1190.84 4803.15,1191.19 4577.02,1191.19 4577.02,1938.73 5511.81,1938.73 5514.42,1939.08 5516.85,1940.08 5518.94,1941.69 5520.55,1943.78 5521.55,1946.21 5521.9,1948.82 5521.9,2293.06 5856.06,2293.06
VCORE on Internal Plane 2 (split plane): 2903.3,1948.82 2903.64,1946.21 2904.65,1943.78 2906.25,1941.69 2908.34,1940.08 2910.78,1939.08 2913.39,1938.73 4460.63,1938.73 4460.63,1191.19 265.99,1191.19 265.99,2804.87 572.59,2804.87 572.59,1476.38 572.93,1473.77 573.94,1471.33 575.55,1469.25 577.63,1467.64 580.07,1466.64 582.68,1466.29 2362.2,1466.29 2364.82,1466.64 2367.25,1467.64 2369.34,1469.25 2370.94,1471.33 2371.95,1473.77 2372.29,1476.38 2372.29,3198.58 2903.3,3198.58
P3V3 on Internal Plane 2 (split plane): 2352.12,1486.46 592.76,1486.46 592.76,2814.96 592.42,2817.57 591.41,2820 589.81,2822.09 587.72,2823.7 585.29,2824.7 582.68,2825.05 255.91,2825.05 253.29,2824.7 250.86,2823.7 248.77,2822.09 247.17,2820 246.16,2817.57 245.82,2814.96 245.82,1181.1 246.16,1178.49 247.17,1176.06 248.77,1173.97 250.86,1172.37 253.29,1171.36 255.91,1171.02 3257.63,1171.02 3257.63,15.08 15.08,15.08 15.08,2993.85 2352.12,2993.85

## Keep-outs
Keep-Out Layer:
  lines w10: 1968.5,3740.16 4527.56,3740.16 5669.29,3740.16 6141.74,3740.16 6141.74,0 5748.03,0 5748.03,196.85 4173.23,196.85 4173.23,0 314.96,0 0,0 0,3740.16 1448.82,3740.16 1972.45,3740.16

## Other copper
Top Layer:
  pour cut-out: 3220.16,3592.83 3544.96,3592.83 3582.68,3555.12 3582.68,3401.57 3653.54,3330.71 3653.54,2787.4 3602.36,2736.22 2960.63,2736.22 2909.45,2787.4 2909.45,3358.27 2940.94,3389.76 3122.05,3389.76 3181.1,3448.82 3181.1,3555.12
  pour cut-out: 5133.86,2440.94 5133.86,2173.23 4937.01,2173.23 4937.01,2440.94
Bottom Layer:
  pour cut-out: 5763.78,633.86 6062.99,633.86 6062.99,362.2 5763.78,362.2
  pour cut-out: 3031.5,3448.82 3031.5,2814.96 3767.72,2814.96 3767.72,3448.82
Internal Plane 1 (plane layer: these items are gaps in the copper):
  rectangle: 3102.36,2929.13 3653.54,3397.64
Internal Plane 2 (plane layer: these items are gaps in the copper):
  rectangle: 4460.63,1169.29 4566.93,1948.82
  rectangle: 5169.29,539.37 5397.64,1334.65
  rectangle: 5216.54,1830.71 5370.08,1913.39
  rectangle: 3267.72,0 4178.25,1181.1
  rectangle: 4173.23,196.85 4793.06,1185.04
  rectangle: 4793.06,196.85 5511.81,570.87
  rectangle: 5744.09,0 6146.75,212.6
  rectangle: 5370.08,192.91 6146.75,1539.37
  rectangle: 5862.2,1535.43 6145.67,2791.34
  rectangle: 4566.93,2779.53 6141.73,3236.22
  rectangle: 2913.39,1948.82 4566.93,3224.41
  rectangle: 2342.52,3208.66 6141.73,3745.17
  rectangle: 0,3003.94 2362.2,3745.59
  lines w20: -5.02,3007.87 -1.08,3003.94 2362.2,3003.94 ; 2362.2,3741.24 2366.14,3745.17 ; 3263.78,1181.1 3267.72,1177.17 3267.72,-5.02 ; 5641.73,2303.15 5866.14,2303.15 5866.14,1929.13 5866.14,1539.37 5374.02,1539.37 5169.29,1334.65 5169.29,1094.49 5169.29,570.87 4803.15,570.87 4803.15,1181.1 4566.93,1181.1 ; 5720.47,2303.15 5511.81,2303.15 5511.81,1948.82 4566.93,1948.82 ; 5866.14,2275.59 5866.14,2779.53 4566.93,2779.53 4566.93,1948.82 ; 4566.93,1181.1 2500,1181.1 2362.2,1181.1 338.58,1181.1 255.91,1181.1 255.91,2814.96 582.68,2814.96 582.68,1476.38 2362.2,1476.38 2362.2,3208.66 2913.39,3208.66 2913.39,1948.82 4566.93,1948.82 ; 4566.93,1181.1 4566.93,1948.82
  lines w40: 5185.04,1322.83 5185.04,1336.13 5370.08,1521.17 ; 5212.6,1326.77 5377.95,1492.13 5385.83,1492.13 ; 5244.09,1318.9 5381.89,1456.69 5397.64,1456.69 ; 5283.46,1314.96 5393.7,1425.2 5393.7,1429.13 ; 5314.96,1303.15 5397.64,1385.83 5409.45,1385.83

## Silkscreen, mask and mechanical layers (free items; w line width, h text height)
Top Overlay:
  text "SD" at 2425.2,3448.82 h30
  text "USB" at 574.8,3370.08 h60
  text "ETHERNET" at 3153.54,3322.83 h60
  text "V+" at 4622.05,2728.35 h27.56
  text "DAT" at 4712.6,2728.35 h27.56
  text "CLK" at 4811.02,2728.35 h27.56
  text "RST" at 4913.39,2728.35 h27.56
  text "GND" at 5011.81,2728.35 h27.56
  text "ICE" at 4401.57,2618.11 h60
  text "PWR" at 5244.09,2440.94 h30
  text "RUN" at 5362.2,2440.94 h30
  text "DCETVM53MB01-REV.0" at 200.79,1346.46 h60 r90
  text "GND" at 1787.4,259.84 h27.56
  text "RX" at 1901.57,259.84 h27.56
  text "TX" at 2000,259.84 h27.56
  text "CVBS" at 3708.66,106.3 h60
  text "REC" at 2228.35,74.8 h30
  text "CONSOLE" at 1736.22,51.18 h60
Mechanical 1:
  circle w0.5: c137.8,3543.31 r62.99
  circle w0.5: c137.8,196.85 r62.99
  circle w0.5: c6003.94,3543.31 r62.99
  circle w0.5: c6003.94,196.85 r62.99
  lines w10: 1141.74,2736.21 1141.74,3870.06 2259.85,3870.06 2259.85,2736.21 1141.74,2736.21 ; 4275.59,3338.57 4275.59,3936.99 5838.59,3936.99 5838.59,3338.57 4275.59,3338.57

## Text inside footprints (layer, text, board x,y; h text height)
C9: Bottom Overlay "+" at 5889.76,1385.83 h27.56 r270
C13: Bottom Overlay "+" at 5889.76,1956.69 h27.56 r270
C14: Bottom Overlay "+" at 5889.76,2527.56 h27.56 r270
M1: Top Overlay "30" at 3641.73,732.28 h27.56; Top Overlay "20" at 3244.09,732.28 h27.56; Top Overlay "10" at 2854.33,732.28 h27.56; Top Overlay "B2" at 472.44,598.43 h27.56; Top Overlay "B1" at 472.44,460.63 h27.56; Top Overlay "C2" at 2448.82,598.43 h27.56; Top Overlay "C1" at 2448.82,460.63 h27.56; Top Overlay "A2" at 3082.72,3096.93 h27.56; Top Overlay "A1" at 3082.72,3242.6 h27.56; Top Overlay "10" at 2692.95,2994.57 h27.56; Top Overlay "20" at 2303.15,2984.25 h27.56; Top Overlay "30" at 1905.55,2994.57 h27.56; Top Overlay "40" at 1511.85,2994.57 h27.56; Top Overlay "50" at 1118.15,2994.57 h27.56; Top Overlay "60" at 724.45,2994.57 h27.56; Top Overlay "10" at 874.06,691.42 h27.56; Top Overlay "20" at 1267.76,691.42 h27.56; Top Overlay "30" at 1661.46,691.42 h27.56; Top Overlay "40" at 2055.16,691.42 h27.56